# Altium PCB IR180-250GF-nohole.PcbDoc
Units mm, origin at the board's own origin, x right, y up, seen from the top; angles counter-clockwise.
Board outline 250 x 180 mm, 2 copper layers (Top Layer, Bottom Layer); 42 components, 41 nets, 84 pads, 265 vias.
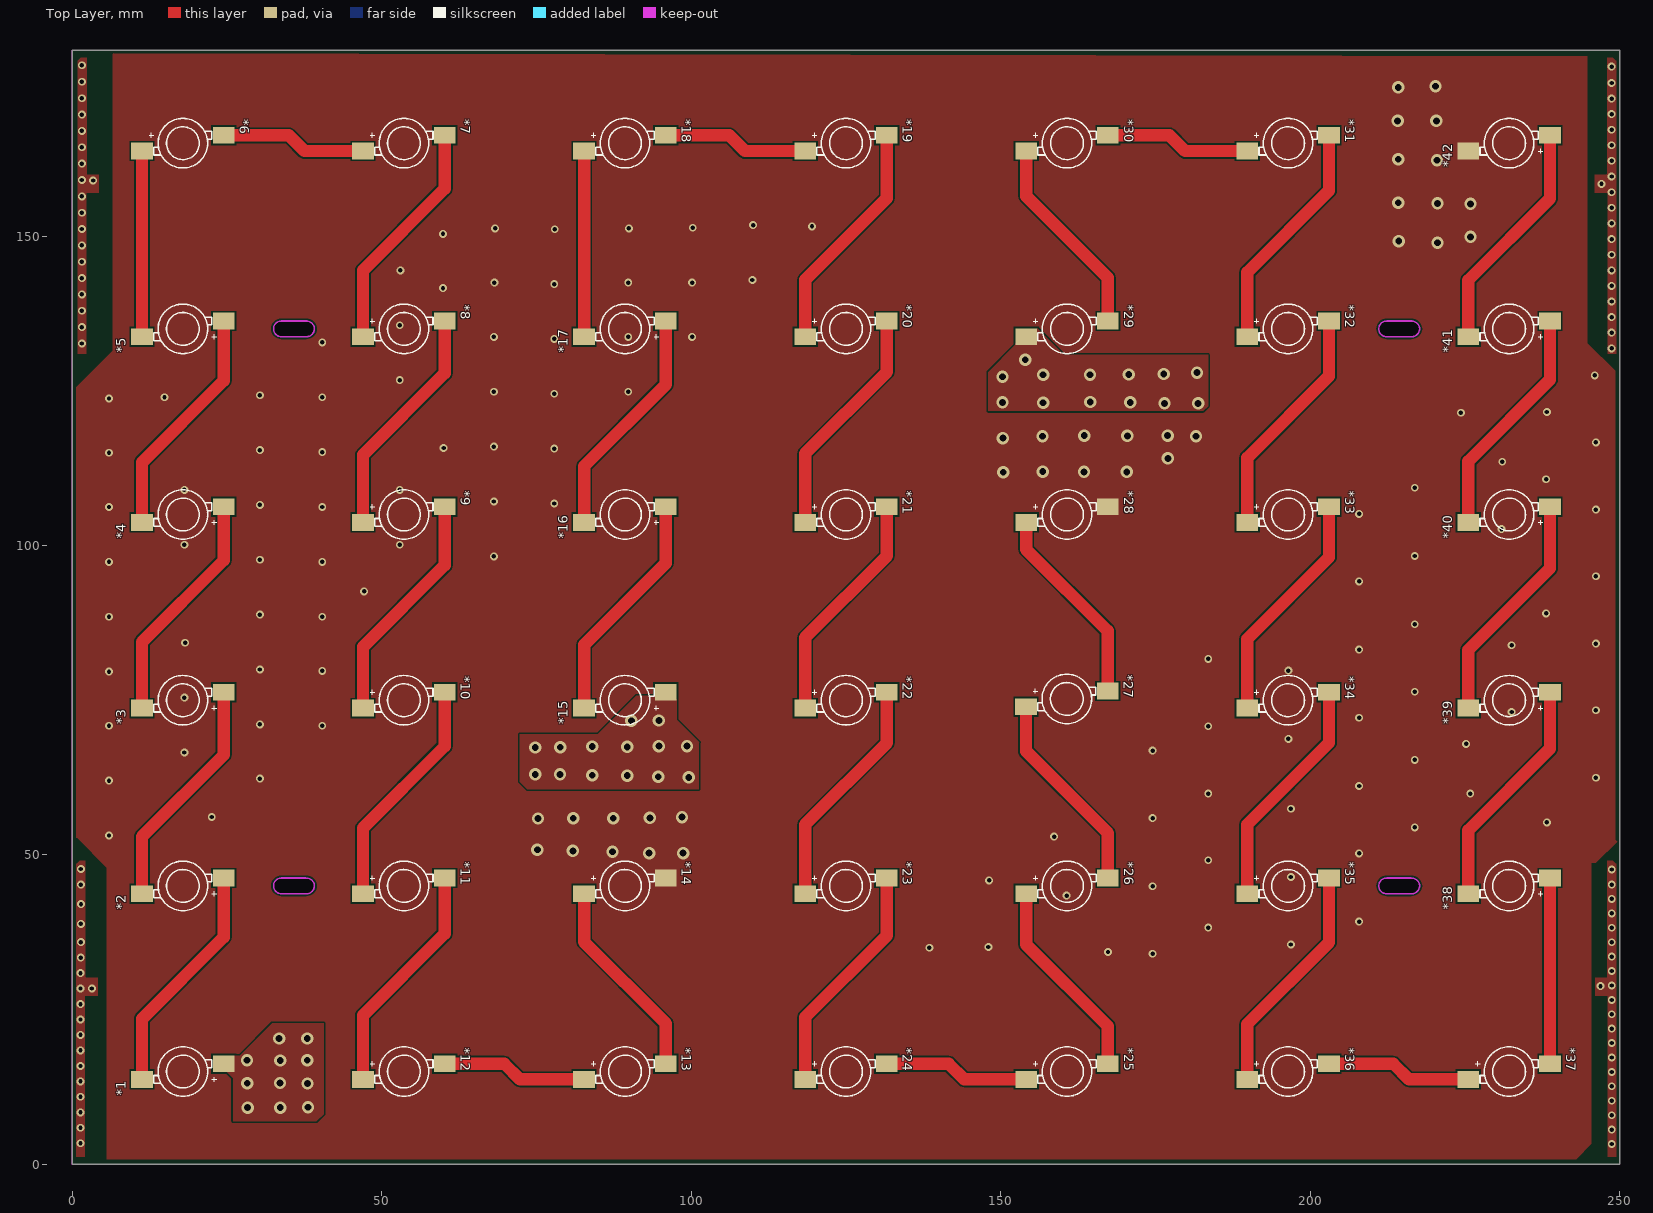
[diagram p0: Top Layer view]
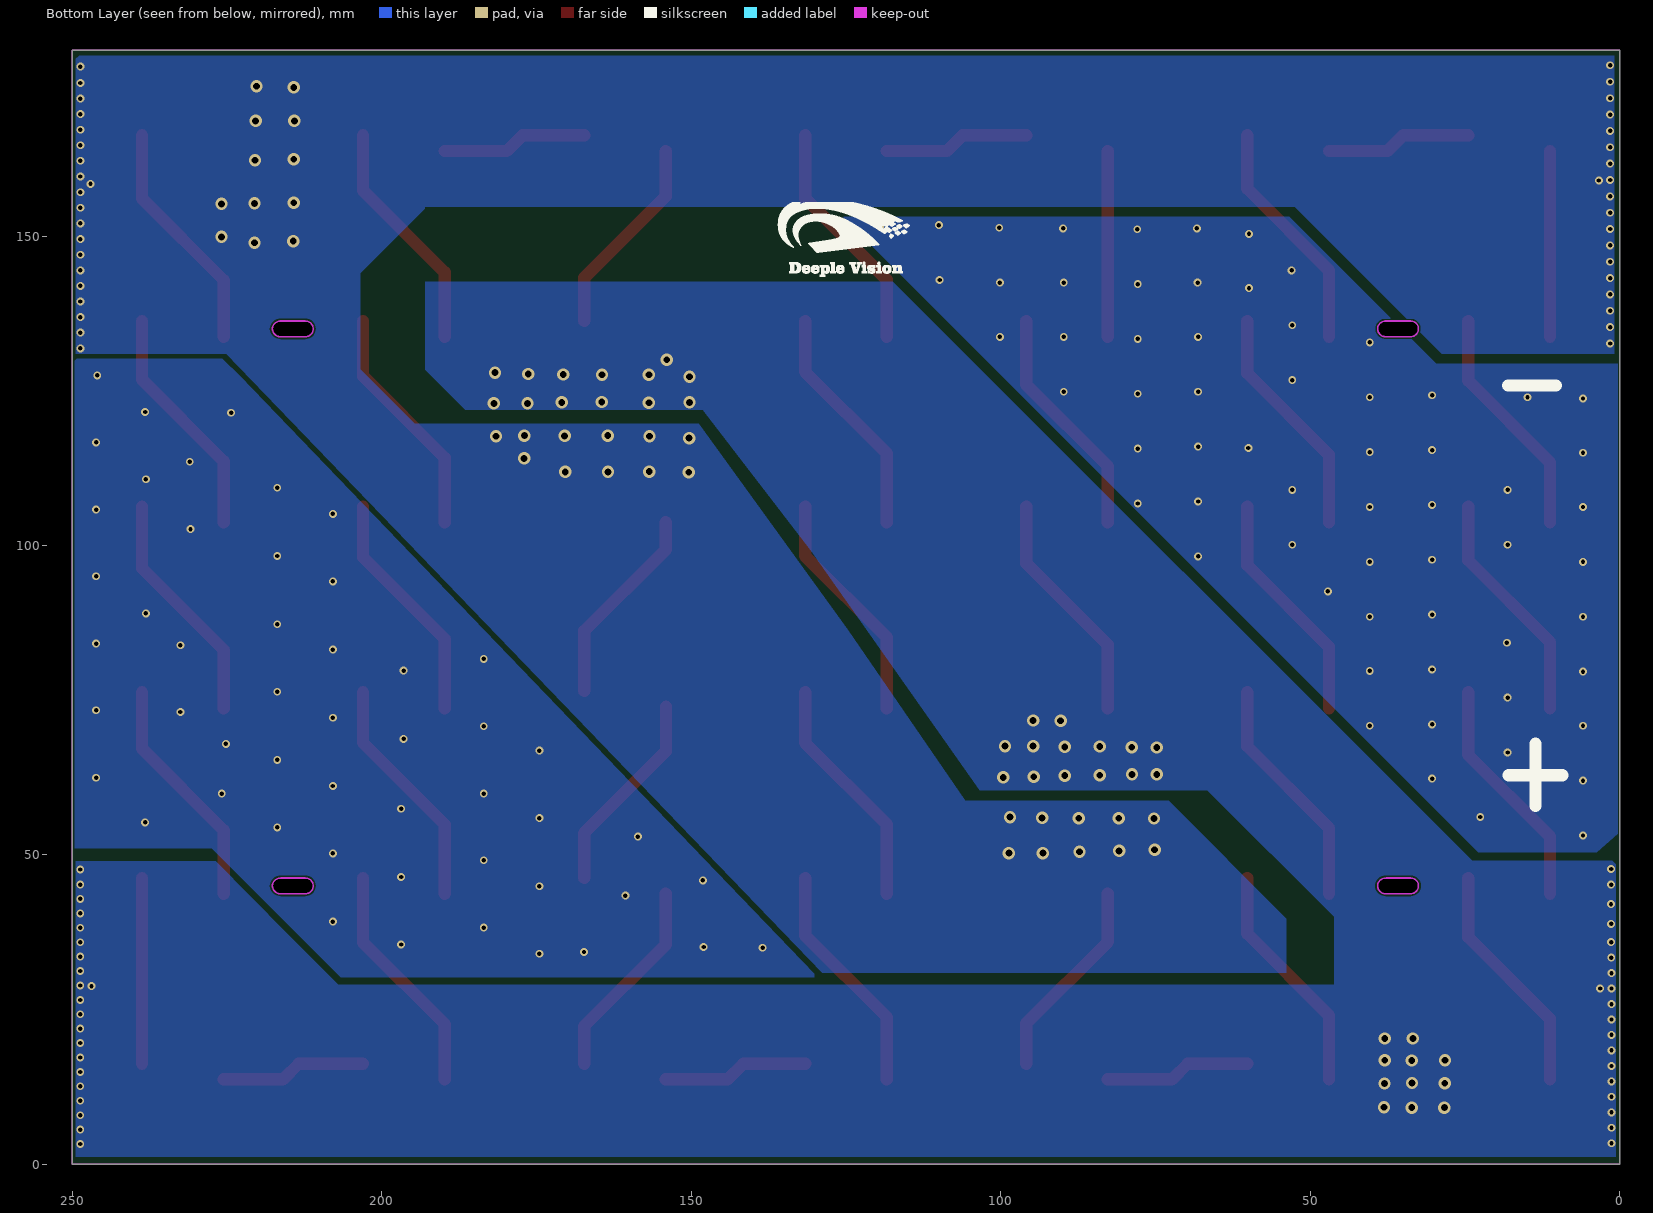
[diagram p1: Bottom Layer view, seen from below]
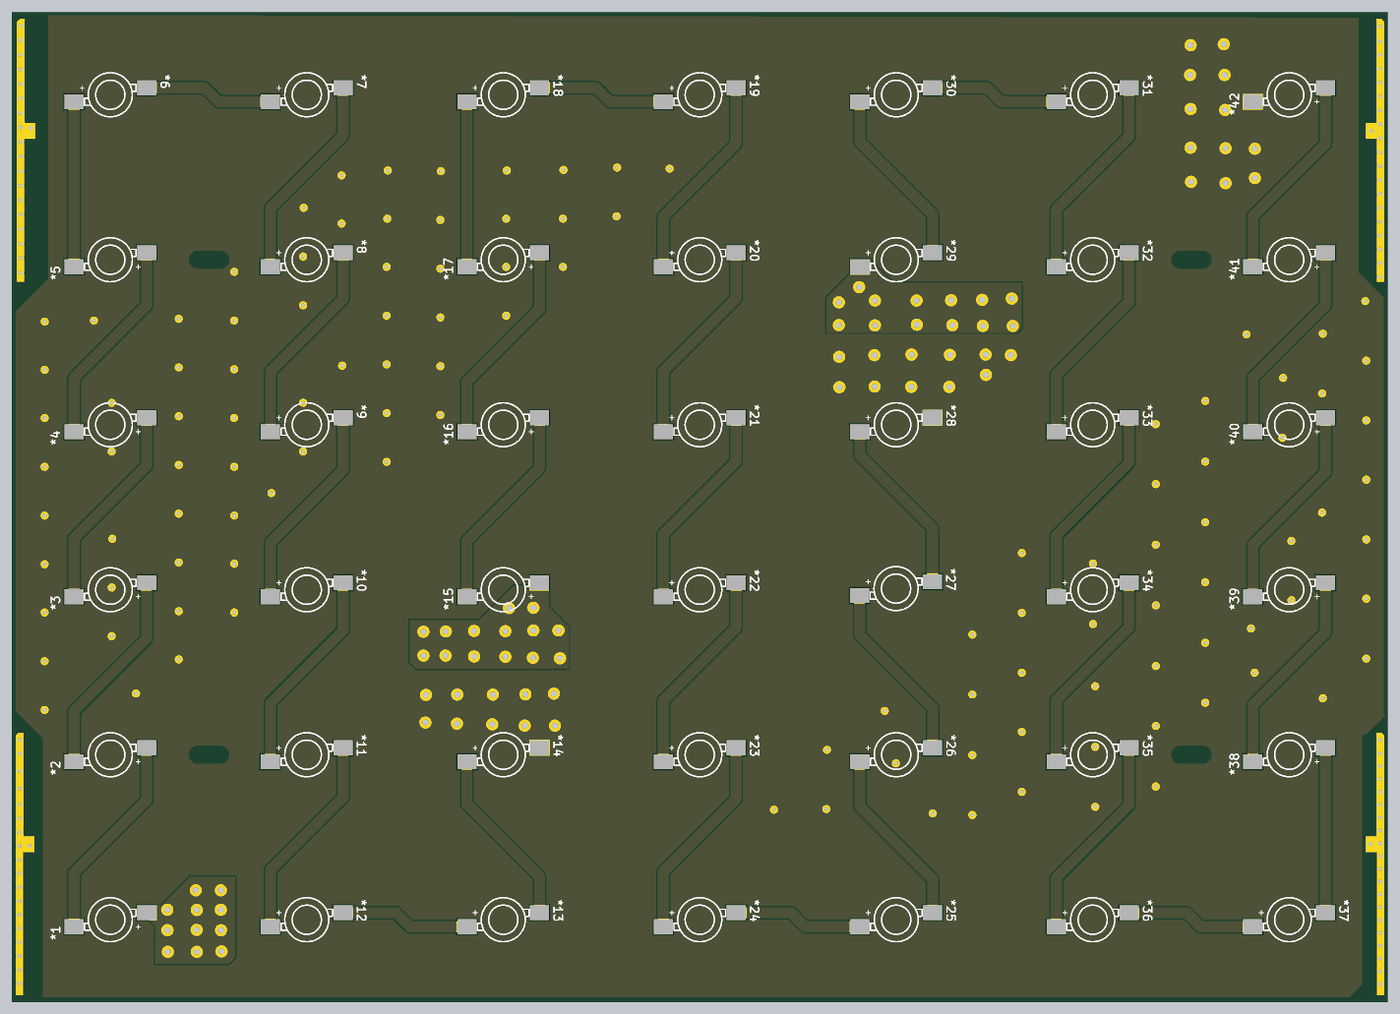
[diagram p2: 3D render of the assembled board from above, using the file's embedded part models]

## Layer stack, top to bottom
Top Solder: solder mask 0.0102, Solder Resist, Dk 3.5
Top Layer: signal copper 0.0356
Dielectric 1: dielectric 0.32, FR-4, Dk 4.8
Bottom Layer: signal copper 0.0356
Bottom Solder: solder mask 0.0102, Solder Resist, Dk 3.5

## Board outline
0,0 0,180 250,180 250,0
cut-out: 33.782,133.731 cw(c33.782,135.001) 32.512,135.001 cw(c33.782,135.001) 33.782,136.271 37.719,136.271 cw(c37.782,134.938) 39.116,135.001 cw(c37.782,135.064) 37.719,133.731
cut-out: 211.082,135.001 ccw(c212.352,135.001) 212.352,133.731 216.289,133.731 ccw(c216.353,135.064) 217.686,135.001 ccw(c216.353,134.938) 216.289,136.271 212.352,136.271 ccw(c212.352,135.001)
cut-out: 211.082,45.001 ccw(c212.352,45.001) 212.352,43.731 216.289,43.731 ccw(c216.353,45.064) 217.686,45.001 ccw(c216.353,44.937) 216.289,46.271 212.352,46.271 ccw(c212.352,45.001)
cut-out: 33.782,43.731 cw(c33.782,45.001) 32.512,45.001 cw(c33.782,45.001) 33.782,46.271 37.719,46.271 cw(c37.782,44.937) 39.116,45.001 cw(c37.782,45.064) 37.719,43.731

## Design rules (kind name [scope] priority, off if disabled: settings)
Clearance Clearance_1 [All] p1: gap=0.254 ignorepadtopadclearanceinfootprint=TRUE except(0: Arc-Hole Track-Hole SMDPad-Hole THPad-Hole Via-Hole Fill-Hole Poly-Hole Region-Hole Text-Hole)
Clearance Clearance_led [InNet('No Net') vs InNet('No Net')] p2 off: gap=0.025 ignorepadtopadclearanceinfootprint=FALSE
ComponentClearance [All] p1 off: gap=0.254 collisioncheckmode=3 verticalgap=0.254 showdistances=FALSE
PolygonConnect [All] p1: connectstyle=Direct reliefconductorwidth=0.254 reliefentries=4 polygonreliefangle="90 Angle" airgapwidth=0.254
RoutingVias [All] p1: holewidth=0.711 width=1.27 viastyle="Through Hole" minholewidth=0.711 minwidth=1.27 maxholewidth=2 maxwidth=2
ShortCircuit [All] p1: allowed=TRUE
SolderMaskExpansion [All] p1: expansion=0.102
Width [All] p1: maxlimit=2 minlimit=0.254 preferedwidth=0.254
28 further rules are at their usual default settings.

## Components (designator, comment, footprint, x,y, rotation, side; value= is the part's Value field where it differs from the comment)
*1 "IRLEDGF" "LED 1W/3W" 17.857,15 r180 top
*2 "IRLEDGF" "LED 1W/3W" 17.857,45 r180 top
*3 "IRLEDGF" "LED 1W/3W" 17.857,75 r180 top
*4 "IRLEDGF" "LED 1W/3W" 17.857,105 r180 top
*5 "IRLEDGF" "LED 1W/3W" 17.857,135 r180 top
*6 "IRLEDGF" "LED 1W/3W" 17.857,165 r0 top
*7 "IRLEDGF" "LED 1W/3W" 53.571,165 r0 top
*8 "IRLEDGF" "LED 1W/3W" 53.571,135 r0 top
*9 "IRLEDGF" "LED 1W/3W" 53.571,105 r0 top
*10 "IRLEDGF" "LED 1W/3W" 53.571,75 r0 top
*11 "IRLEDGF" "LED 1W/3W" 53.571,45 r0 top
*12 "IRLEDGF" "LED 1W/3W" 53.571,15 r0 top
*13 "IRLEDGF" "LED 1W/3W" 89.285,15 r0 top
*14 "IRLEDGF" "LED 1W/3W" 89.285,45 r0 top
*15 "IRLEDGF" "LED 1W/3W" 89.285,75 r180 top
*16 "IRLEDGF" "LED 1W/3W" 89.285,105 r180 top
*17 "IRLEDGF" "LED 1W/3W" 89.285,135 r180 top
*18 "IRLEDGF" "LED 1W/3W" 89.285,165 r0 top
*19 "IRLEDGF" "LED 1W/3W" 124.999,165 r0 top
*20 "IRLEDGF" "LED 1W/3W" 124.999,135 r0 top
*21 "IRLEDGF" "LED 1W/3W" 124.999,105 r0 top
*22 "IRLEDGF" "LED 1W/3W" 124.999,75 r0 top
*23 "IRLEDGF" "LED 1W/3W" 124.999,45 r0 top
*24 "IRLEDGF" "LED 1W/3W" 124.999,15 r0 top
*25 "IRLEDGF" "LED 1W/3W" 160.713,15 r0 top
*26 "IRLEDGF" "LED 1W/3W" 160.713,45 r0 top
*27 "IRLEDGF" "LED 1W/3W" 160.68,75.209 r0 top
*28 "IRLEDGF" "LED 1W/3W" 160.713,105 r0 top
*29 "IRLEDGF" "LED 1W/3W" 160.713,135 r0 top
*30 "IRLEDGF" "LED 1W/3W" 160.713,165 r0 top
*31 "IRLEDGF" "LED 1W/3W" 196.427,165 r0 top
*32 "IRLEDGF" "LED 1W/3W" 196.427,135 r0 top
*33 "IRLEDGF" "LED 1W/3W" 196.427,105 r0 top
*34 "IRLEDGF" "LED 1W/3W" 196.427,75 r0 top
*35 "IRLEDGF" "LED 1W/3W" 196.427,45 r0 top
*36 "IRLEDGF" "LED 1W/3W" 196.427,15 r0 top
*37 "IRLEDGF" "LED 1W/3W" 232.141,15 r0 top
*38 "IRLEDGF" "LED 1W/3W" 232.141,45 r180 top
*39 "IRLEDGF" "LED 1W/3W" 232.141,75 r180 top
*40 "IRLEDGF" "LED 1W/3W" 232.141,105 r180 top
*41 "IRLEDGF" "LED 1W/3W" 232.141,135 r180 top
*42 "IRLEDGF" "LED 1W/3W" 232.141,165 r180 top

## Footprints (in the part's own frame and the unit in brackets; to place one, negate y for a bottom-side part, rotate by r counter-clockwise, add the part's x,y. Pads: shape width x height; smd on the part's side, far side on the other; paste and mask are expansions set on the pad)
"LED 1W/3W" [mm] "大功率LED                      淘宝ID:黄晶宝石"
  rect 3.5x2.7 smd: 1(-6.604,-1.27) 2(6.604,1.27)
  silkscreen extent -5.46,-4 4.7,4, body extent -7.2,-4 7.2,4, height 5.26

## Via types
v1: diameter 1.27, hole 0.712, Top Layer to Bottom Layer, 194 vias
v2: diameter 2, hole 1.1, Top Layer to Bottom Layer, 71 vias

## Nets (pads, with @x,y where several pads share a name; then routed paths per layer and width w, separated by ;. In a path a pad name is that pad's centre, name@x,y a point inside that pad or via, vN(x,y) a via of type N, cw(c..) or ccw(c..) an arc to the next point about the centre after c; other vN are vias at no path point)
GND: *14.2 *28.2 *42.2
  other v1: 174.549,34.036 167.335,34.315 138.481,35.001 148.006,35.128 196.875,35.535 183.54,38.252 207.899,39.218 160.655,43.434 174.549,44.933 148.133,45.898 196.875,46.431 183.54,49.149 207.899,50.241 158.623,52.959 5.918,53.137 216.891,54.458 238.252,55.27 174.549,55.956 22.53,56.134 196.875,57.455 183.54,59.919 225.857,59.919 207.899,61.138 5.918,62.001 30.302,62.332 246.151,62.484 216.891,65.354 18.11,66.548 174.549,66.853 225.196,67.945 196.469,68.758 183.54,70.79 5.918,70.866 40.386,70.866 30.302,71.095 207.899,72.161 232.537,73.101 246.151,73.381 18.11,75.413 216.891,76.378 5.918,79.629 40.386,79.731 196.469,79.781 30.302,79.959 183.54,81.686 207.899,83.185 232.537,83.871 246.151,84.15 18.212,84.277 216.891,87.274 5.918,88.494 40.386,88.494 30.302,88.824 238.125,89.027 47.142,92.583 207.899,94.209 246.151,95.021 5.918,97.358 40.386,97.358 30.302,97.688 68.097,98.247 216.891,98.298 18.11,100.127 52.908,100.127 230.911,102.641 207.899,105.105 246.151,105.791 5.918,106.223 40.386,106.223 30.302,106.553 77.851,106.782 68.097,107.112 18.11,108.991 52.908,108.991 216.891,109.322 238.125,110.693 231.038,113.538 5.918,114.986 40.386,115.087 30.302,115.418 77.851,115.646 59.995,115.748 68.097,115.976 246.151,116.662 224.358,121.437 238.252,121.564 5.918,123.749 14.884,123.952 40.386,123.952 30.302,124.282 77.851,124.511 68.097,124.841 89.814,124.841 52.908,126.721 245.974,127.483 248.691,131.851 1.549,132.639 40.386,132.817 77.851,133.375 68.097,133.706 89.814,133.706 100.127,133.706 248.691,134.391 1.549,135.28 52.908,135.585 248.691,136.906 1.549,137.922 248.691,139.421 1.549,140.564 59.893,141.58 248.691,141.935 77.851,142.24 68.199,142.469 89.814,142.469 100.127,142.469 109.88,142.9 1.549,143.205 53.01,144.45 248.691,144.45 1.549,145.847 248.691,146.964 1.549,148.488 248.691,149.504 59.893,150.343 77.953,151.105 1.549,151.13 68.301,151.232 89.916,151.232 100.228,151.333 119.507,151.562 109.982,151.765 248.691,152.044 1.549,153.772 248.691,154.559 1.549,156.413 248.691,157.074 247.066,158.42 3.353,158.979 1.549,159.055 248.691,159.614 1.549,161.696 248.691,162.154 1.549,164.338 248.691,164.668 1.549,166.98 248.691,167.183 1.549,169.621 248.691,169.697 248.691,172.212 1.549,172.263 248.691,174.727 1.549,174.93 248.691,177.368 1.549,177.597
  other v2: 93.193,50.292 98.679,50.292 87.274,50.521 80.874,50.648 75.133,50.851 75.235,55.88 80.924,55.931 87.401,55.931 93.32,55.982 98.501,56.109 150.393,111.836 163.449,111.887 170.358,111.887 156.794,111.938 177.013,114.071 150.343,117.348 156.743,117.653 181.559,117.653 170.459,117.704 163.5,117.754 176.962,117.754 220.574,148.92 214.3,149.174 225.908,149.86 225.908,155.194 220.574,155.27 214.224,155.372 220.497,162.23 214.224,162.408 214.122,168.605 220.396,168.605 214.224,174.015 220.243,174.193
Net*1_2: *1.2 *2.1 | length 38
  Top Layer w2: *1.2 11.253,23.521 24.461,36.729 *2.1
Net*2_2: *2.2 *3.1 | length 38
  Top Layer w2: *2.2 11.253,52.96 24.461,66.168 *3.1
Net*3_2: *3.2 *4.1 | length 38
  Top Layer w2: *3.2 11.253,84.405 24.461,97.613 *4.1
Net*4_2: *4.2 *5.1 | length 38
  Top Layer w2: *4.2 11.253,113.437 24.461,126.645 *5.1
Net*5_2: *5.2 *6.1 | length 30
  Top Layer w2: *5.2 *6.1
Net*6_2: *6.2 *7.1 | length 23.6
  Top Layer w2: *6.2 34.974,166.27 37.514,163.73 *7.1
Net*7_2: *7.2 *8.1 | length 38
  Top Layer w2: *8.1 46.967,144.452 60.175,157.66 *7.2
Net*8_2: *8.2 *9.1 | length 38
  Top Layer w2: *9.1 46.967,114.633 60.175,127.841 *8.2
Net*9_2: *9.2 *10.1 | length 38
  Top Layer w2: *10.1 46.967,83.619 60.175,96.827 *9.2
Net*10_2: *10.2 *11.1 | length 38
  Top Layer w2: *11.1 46.967,54.358 60.175,67.566 *10.2
Net*11_2: *11.2 *12.1 | length 38
  Top Layer w2: *12.1 46.967,24.082 60.175,37.29 *11.2
Net*12_2: *12.2 *13.1 | length 23.6
  Top Layer w2: *12.2 69.785,16.27 72.325,13.73 *13.1
Net*13_2: *13.2 *14.1 | length 32.9
  Top Layer w2: *14.1 82.681,35.962 95.889,22.754 *13.2
Net*15_2: *15.2 *16.1 | length 38
  Top Layer w2: *15.2 82.681,83.951 95.889,97.159 *16.1
Net*16_2: *16.2 *17.1 | length 38
  Top Layer w2: *16.2 82.681,112.805 95.889,126.013 *17.1
Net*17_2: *17.2 *18.1 | length 30
  Top Layer w2: *17.2 *18.1
Net*18_2: *18.2 *19.1 | length 23.6
  Top Layer w2: *18.2 106.145,166.27 108.685,163.73 *19.1
Net*19_2: *19.2 *20.1 | length 38
  Top Layer w2: *20.1 118.395,142.906 131.603,156.114 *19.2
Net*20_2: *20.2 *21.1 | length 38
  Top Layer w2: *21.1 118.395,114.839 131.603,128.047 *20.2
Net*21_2: *21.2 *22.1 | length 38
  Top Layer w2: *22.1 118.395,85.121 131.603,98.329 *21.2
Net*22_2: *22.2 *23.1 | length 38
  Top Layer w2: *23.1 118.395,54.895 131.603,68.103 *22.2
Net*23_2: *23.2 *24.1 | length 38
  Top Layer w2: *24.1 118.395,23.78 131.603,36.988 *23.2
Net*24_2: *24.2 *25.1 | length 23.6
  Top Layer w2: *24.2 141.591,16.27 144.131,13.73 *25.1
Net*25_2: *25.2 *26.1 | length 32.9
  Top Layer w2: *26.1 154.109,35.527 167.317,22.319 *25.2
Net*26_2: *26.2 *27.1 | length 33.2
  Top Layer w2: *27.1 154.076,66.777 167.317,53.536 *26.2
Net*27_2: *27.2 *28.1 | length 32.7
  Top Layer w2: *28.1 154.109,99.383 167.284,86.208 *27.2
Net*29_2: *29.2 *30.1 | length 32.9
  Top Layer w2: *30.1 154.109,156.457 167.317,143.249 *29.2
Net*30_2: *30.2 *31.1 | length 23.6
  Top Layer w2: *30.2 177.265,166.27 179.805,163.73 *31.1
Net*31_2: *31.2 *32.1 | length 38
  Top Layer w2: *32.1 189.823,144.128 203.031,157.336 *31.2
Net*32_2: *32.2 *33.1 | length 38
  Top Layer w2: *33.1 189.823,114.156 203.031,127.364 *32.2
Net*33_2: *33.2 *34.1 | length 38
  Top Layer w2: *34.1 189.823,84.896 203.031,98.104 *33.2
Net*34_2: *34.2 *35.1 | length 38
  Top Layer w2: *35.1 189.823,54.924 203.031,68.132 *34.2
Net*35_2: *35.2 *36.1 | length 38
  Top Layer w2: *36.1 189.823,22.666 203.031,35.874 *35.2
Net*36_2: *36.2 *37.1 | length 23.6
  Top Layer w2: *36.2 213.422,16.27 215.962,13.73 *37.1
Net*37_2: *37.2 *38.1 | length 30
  Top Layer w2: *37.2 *38.1
Net*38_2: *38.2 *39.1 | length 38
  Top Layer w2: *38.2 225.537,53.96 238.745,67.168 *39.1
Net*39_2: *39.2 *40.1 | length 38
  Top Layer w2: *39.2 225.537,83.119 238.745,96.327 *40.1
Net*40_2: *40.2 *41.1 | length 38
  Top Layer w2: *40.2 225.537,113.599 238.745,126.807 *41.1
Net*41_2: *41.2 *42.1 | length 38
  Top Layer w2: *41.2 225.537,142.86 238.745,156.068 *42.1
VCC: *1.1 *15.1 *29.1
  other v1: 248.717,3.302 1.321,3.429 248.717,5.613 1.321,5.918 248.717,7.95 1.321,8.407 248.717,10.287 1.321,10.922 248.717,12.624 1.321,13.411 248.717,14.935 1.321,15.9 248.717,17.272 1.321,18.415 248.717,19.609 1.321,20.93 248.717,21.946 1.321,23.419 248.717,24.257 1.321,25.908 248.717,26.568 1.321,28.423 3.15,28.423 246.913,28.804 248.717,28.905 1.321,30.912 248.717,31.242 1.346,33.401 248.717,33.579 248.717,35.89 1.372,35.916 248.717,38.227 1.372,38.862 248.717,40.564 1.397,42.062 248.717,42.901 1.372,45.212 248.717,45.212 248.717,47.65 1.372,47.727
  other v2: 28.321,9.169 33.579,9.169 38.075,9.246 37.998,13.081 28.245,13.106 33.553,13.157 33.579,16.789 28.219,16.815 37.948,16.815 33.401,20.345 37.948,20.345 99.593,62.535 94.666,62.636 89.662,62.814 83.998,62.865 74.778,63.017 78.791,63.017 74.778,67.361 78.842,67.412 89.662,67.462 83.998,67.513 94.767,67.589 99.314,67.589 90.322,71.679 94.767,71.73 176.454,122.961 181.889,122.961 156.845,123.063 150.292,123.114 170.917,123.114 164.465,123.19 150.292,127.254 156.845,127.584 164.414,127.584 170.688,127.635 176.327,127.711 181.712,127.94 153.975,130.023

## Polygon pours and split planes (outlines as drawn)
GND on Top Layer "mos_gnd" (solid, remove dead copper, pour order 43): 6.528,179.492 6.528,131.445 0.635,125.552 0.635,52.756 0.787,52.756 5.588,47.955 5.588,0.864 242.976,0.864 245.44,3.327 245.44,48.717 246.177,48.717 249.606,52.146 249.301,52.451 249.301,128.219 244.805,132.715 244.805,179.019
GND on Top Layer "VCCholes" (solid, remove dead copper, pour order 31): 249.428,130.988 248.056,130.988 248.056,157.023 245.999,157.023 245.999,159.918 247.853,159.918 247.98,160.045 247.98,178.791 248.869,178.791 249.377,178.283 249.428,178.283
GND on Top Layer "VCCholes" (solid, remove dead copper, pour order 29): 0.838,130.988 2.21,130.988 2.21,157.023 4.267,157.023 4.267,159.918 2.413,159.918 2.286,160.045 2.286,178.791 1.397,178.791 0.889,178.283 0.838,178.283
VCC on Top Layer "VCCholes" (solid, remove dead copper, pour order 27): 249.453,1.245 248.082,1.245 248.082,27.28 246.024,27.28 246.024,30.175 247.879,30.175 248.006,30.302 248.006,49.047 248.895,49.047 249.403,48.539 249.453,48.539
VCC on Top Layer "VCCholes" (solid, remove dead copper, pour order 25): 0.635,1.245 2.007,1.245 2.007,27.28 4.064,27.28 4.064,30.175 2.21,30.175 2.083,30.302 2.083,49.047 1.194,49.047 0.686,48.539 0.635,48.539
GND on Top Layer "GNDhole" (solid, remove dead copper, pour order 16): 227.254,165.049 223.393,168.91 223.393,175.082 221.285,177.19 221.183,177.089 212.446,177.089 212.446,147.523 212.446,146.837 212.446,146.177 224.46,146.177 227.254,148.971
GND on Top Layer "GNDhole" (solid, remove dead copper, pour order 14): 169.062,107.594 174.168,112.7 181.204,112.7 183.617,115.113 183.617,119.112 183.146,119.507 147.93,119.507 147.93,110.541 149.936,108.534 161.95,108.534 165.608,104.877
GND on Top Layer "GNDhole" (solid, remove dead copper, pour order 12): 97.561,47.574 97.688,47.574 101.219,51.105 101.219,58.903 73.635,58.903 72.009,57.277 72.009,47.803 91.491,47.803 94.285,45.009
VCC on Top Layer "VCChole" (solid, remove dead copper, pour order 10): 152.375,132.41 147.98,128.016 147.98,121.742 182.728,121.742 183.49,122.504 183.49,130.835 160.147,130.835 155.88,135.103 154.94,134.163 153.01,134.163
no net on Top Layer "mos_gnd" (solid, remove dead copper, pour order 6): 99.949,73.101
VCC on Top Layer "VCChole" (solid, remove dead copper, pour order 4): 97.638,75.147 97.638,71.857 101.27,68.224 101.219,68.174 101.219,60.63 73.482,60.63 72.288,61.824 72.288,69.52 84.912,69.52 91.11,75.717 95.301,75.717
VCC on Top Layer "VCChole" (solid, remove dead copper, pour order 2): 26.086,17.577 27.051,17.577 32.258,22.784 40.589,22.784 40.589,8.128 39.446,6.985 25.959,6.985 25.959,13.919 24.359,15.519 24.359,17.475
GND on Bottom Layer "mos_gnd" (solid, remove dead copper, pour order 35): 0,53.644 0,129.362 29.616,129.362 53.365,153.111 125.552,153.111 22.885,50.444 3.676,50.444
GND on Bottom Layer "GNDhole" (solid, remove dead copper, pour order 20): 105.704,58.725 72.873,58.725 53.873,39.726 53.873,30.937 128.803,30.937 225.12,130.988 249.428,130.988 249.428,178.613 248.895,179.146 0.838,179.146 0.838,131.013 0.864,130.988 28.753,130.988 52.476,154.711 193.065,154.711 193.065,154.407 203.454,144.018 203.454,128.448 194.64,119.634 148.793,119.634 124.714,86.36
VCC on Bottom Layer "VCChole" (solid, remove dead copper, pour order 18): 148.158,121.971 186.538,121.971 192.964,128.397 192.964,142.621 117.424,142.621 23.851,49.047 1.168,49.047 0.635,48.514 0.635,1.245 44.168,1.245 46.152,3.229 46.152,40.03 66.599,60.477 103.4,60.477 130.719,99.191
GND on Bottom Layer "mos_gnd" (solid, remove dead copper, pour order 41): 249.631,129.845 249.276,130.2 225.755,130.2 222.86,127.305 130.15,30.81 130.15,30.277 206.654,30.277 227.482,51.105 249.631,51.105
no net on Bottom Layer "mos_gnd" (solid, remove dead copper, pour order 39): 231.851,81.331
no net on Bottom Layer "mos_gnd" (solid, remove dead copper, pour order 37): 234.34,79.781
no net on Bottom Layer "mos_gnd" (solid, remove dead copper, pour order 33): 0.838,179.146
VCC on Bottom Layer "VCChole" (solid, remove dead copper, pour order 22): 226.847,48.997 249.453,48.997 249.453,1.245 44.069,1.245 36.297,9.017 41.605,14.326 41.605,29.032 207.01,29.032 215.494,37.516

## Keep-outs
Keep-Out Layer:
  lines w0.076: 0,0 0,180 250,180 250,0 0,0
  lines w0.255: 32.512,45.001 cw(c33.782,45.001) 33.782,46.271 37.719,46.271 cw(c37.782,44.937) 39.116,45.001 cw(c37.782,45.064) 37.719,43.731 33.782,43.731 cw(c33.782,45.001) 32.512,45.001 ; 32.512,135.001 ccw(c33.782,135.001) 33.782,133.731 37.719,133.731 ccw(c37.782,135.064) 39.116,135.001 ccw(c37.782,134.938) 37.719,136.271 33.782,136.271 ccw(c33.782,135.001) 32.512,135.001 ; 211.082,45.001 cw(c212.352,45.001) 212.352,46.271 216.289,46.271 cw(c216.353,44.937) 217.686,45.001 cw(c216.353,45.064) 216.289,43.731 212.352,43.731 cw(c212.352,45.001) 211.082,45.001 ; 211.082,135.001 cw(c212.352,135.001) 212.352,136.271 216.289,136.271 cw(c216.353,134.938) 217.686,135.001 cw(c216.353,135.064) 216.289,133.731 212.352,133.731 cw(c212.352,135.001) 211.082,135.001

## Silkscreen, mask and mechanical layers (free items; w line width, h text height)
Bottom Overlay:
  drawing of 3618 lines, arcs and shapes, not listed
Top Solder:
  region: 249.428,48.539 249.403,48.539 248.895,49.047 248.006,49.047 248.006,30.302 247.879,30.175 246.024,30.175 246.024,27.28 248.082,27.28 248.082,1.219 248.107,1.245 249.453,1.245 249.453,48.514
  region: 254.254,180.569
  region: 247.98,178.791 247.98,160.045 247.853,159.918 245.999,159.918 245.999,157.023 248.056,157.023 248.056,130.962 248.082,130.988 249.428,130.988 249.428,178.257 248.895,178.791
  region: 2.286,178.816 1.346,178.816 0.838,178.308 0.838,131.013 2.184,131.013 2.21,130.988 2.21,157.048 4.267,157.048 4.267,159.944 2.413,159.944 2.286,160.071
  region: 2.083,49.073 1.194,49.073 0.686,48.565 0.635,48.565 0.635,1.27 0.66,1.245 2.007,1.245 2.007,27.305 4.064,27.305 4.064,30.201 2.21,30.201 2.21,48.946
Bottom Solder:
  rectangle: 4.928,131.013 12.751,137.058
  rectangle: 4.293,42.926 12.116,48.971
Mechanical 1:
  the board outline again, w0.076